# Altium PCB GBA CleanLight.PcbDoc
Units mm, origin at the board's own origin, x right, y up, seen from the top; angles counter-clockwise.
Board outline 130.09 x 53.51 mm, 2 copper layers (Top Layer, Bottom Layer); 35 components, 24 nets, 78 pads, 35 vias.
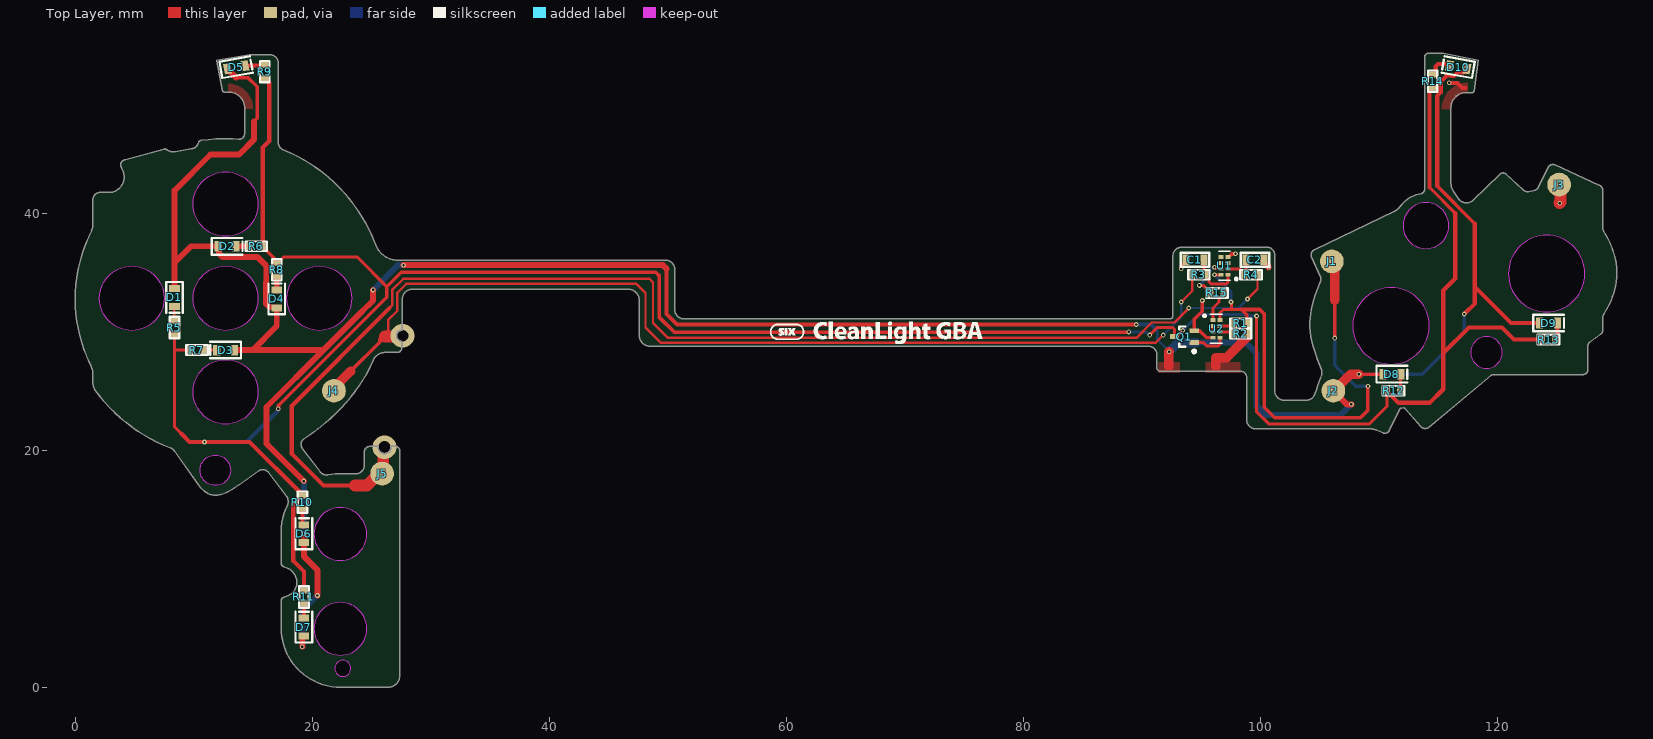
[diagram p0: Top Layer view]
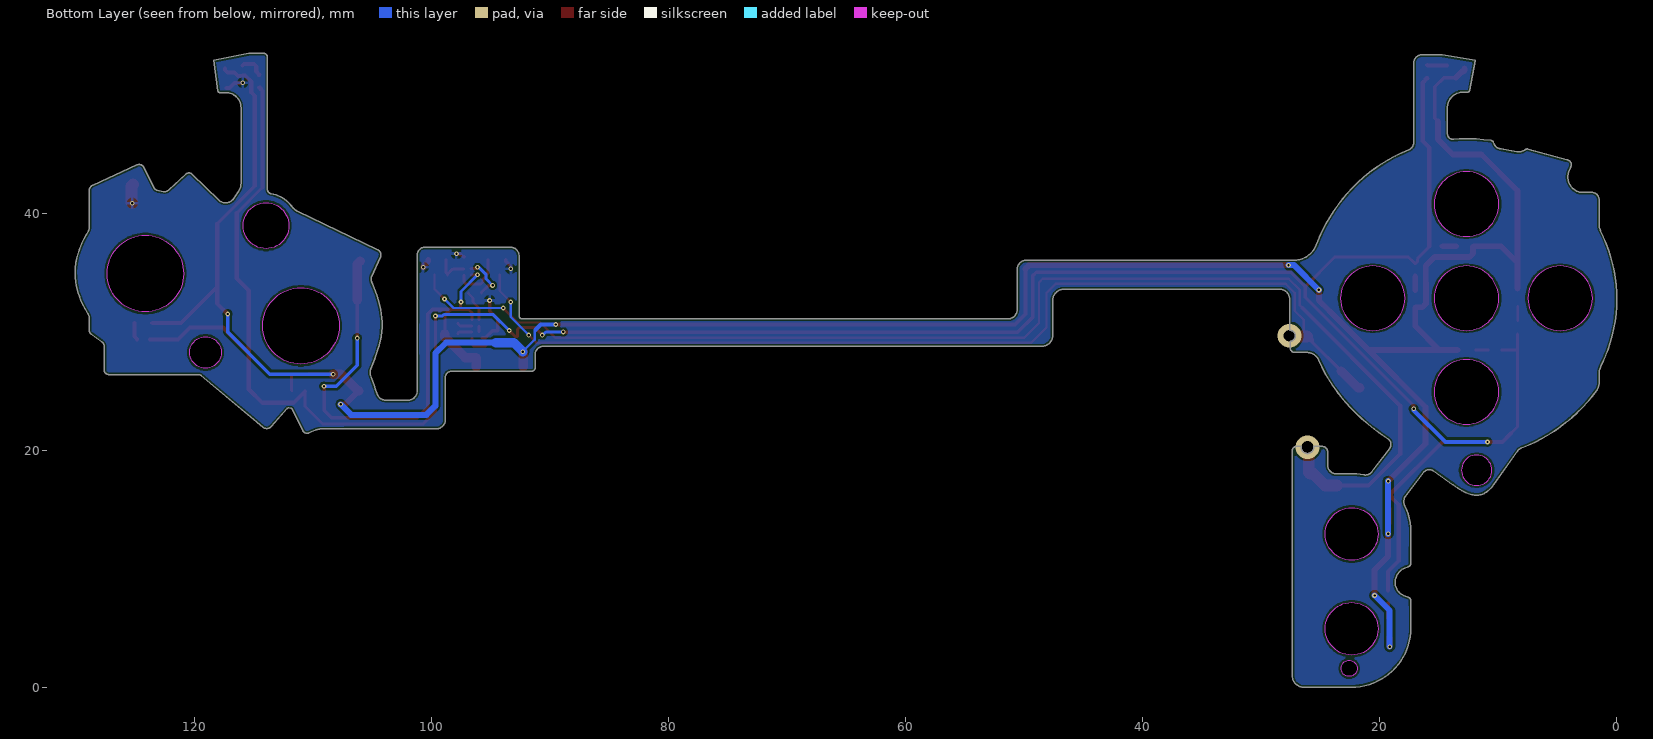
[diagram p1: Bottom Layer view, seen from below]

## Layer stack, top to bottom
Top Solder: solder mask 0.0102, Solder Resist, Dk 3.5
Top Layer: signal copper 0.0356
Dielectric 1: dielectric 0.32, FR-4, Dk 4.8
Bottom Layer: signal copper 0.0356
Bottom Solder: solder mask 0.0102, Solder Resist, Dk 3.5

## Board outline
359 vertices, not listed, extent 0.005,-0.001 130.095,53.507
cut-out: 4.785,30.098 cw(c4.785,32.825) 2.058,32.825 cw(c4.785,32.824) 4.785,35.552 cw(c4.785,32.825) 7.512,32.825 cw(c4.785,32.824)
cut-out: 12.7,30.098 cw(c12.7,32.825) 9.973,32.825 cw(c12.7,32.824) 12.7,35.552 cw(c12.7,32.824) 15.427,32.825 cw(c12.7,32.825)
cut-out: 12.7,38.041 cw(c12.7,40.768) 9.973,40.768 cw(c12.7,40.768) 12.7,43.496 cw(c12.7,40.768) 15.427,40.768 cw(c12.7,40.768)
cut-out: 12.7,22.199 cw(c12.7,24.926) 9.973,24.926 cw(c12.7,24.926) 12.7,27.654 cw(c12.7,24.926) 15.427,24.926 cw(c12.7,24.926)
cut-out: 12.7,22.199 cw(c12.7,24.926) 9.973,24.926 cw(c12.7,24.926) 12.7,27.654 cw(c12.7,24.926) 15.427,24.926 cw(c12.7,24.926)
cut-out: 20.604,30.098 cw(c20.604,32.825) 17.877,32.825 cw(c20.605,32.824) 20.604,35.552 cw(c20.604,32.824) 23.332,32.825 cw(c20.605,32.825)
cut-out: 11.835,17.026 cw(c11.835,18.312) 10.549,18.312 cw(c11.835,18.312) 11.835,19.598 cw(c11.835,18.312) 13.121,18.312 cw(c11.835,18.312)
cut-out: 20.159,12.93 ccw(c22.382,12.93) 22.382,10.707 ccw(c22.382,12.93) 24.605,12.93 ccw(c22.382,12.93) 22.382,15.153 ccw(c22.382,12.93)
cut-out: 20.159,4.935 ccw(c22.382,4.935) 22.382,2.713 ccw(c22.382,4.935) 24.605,4.935 ccw(c22.382,4.936) 22.382,7.158 ccw(c22.382,4.935)
cut-out: 21.914,1.591 ccw(c22.592,1.591) 22.592,0.913 ccw(c22.593,1.591) 23.27,1.591 ccw(c22.593,1.591) 22.592,2.269 ccw(c22.592,1.591)
cut-out: 112.05,38.949 ccw(c113.986,38.949) 113.986,37.013 ccw(c113.986,38.949) 115.922,38.949 ccw(c113.986,38.949) 113.986,40.885 ccw(c113.986,38.949)
cut-out: 120.94,34.905 ccw(c124.169,34.904) 124.17,31.675 ccw(c124.17,34.905) 127.399,34.905 ccw(c124.17,34.904) 124.17,38.134 ccw(c124.17,34.905)
cut-out: 107.813,30.499 ccw(c111.043,30.499) 111.043,27.269 ccw(c111.043,30.499) 114.273,30.499 ccw(c111.043,30.499) 111.043,33.728 ccw(c111.043,30.498)
cut-out: 117.756,28.25 ccw(c119.096,28.25) 119.096,26.911 ccw(c119.096,28.25) 120.435,28.25 ccw(c119.096,28.25) 119.096,29.59 ccw(c119.096,28.25)

## Design rules (kind name [scope] priority, off if disabled: settings)
BoardOutlineClearance [All] p1: gap=0 ignorepadtopadclearanceinfootprint=FALSE except(0.2: Poly-OutlineEdge Poly-CavityEdge Poly-CutoutEdge Poly-SplitBarrior Poly-SplitContinuation Region-OutlineEdge Region-CavityEdge Region-CutoutEdge Region-SplitBarrior Region-SplitContinuation)
Clearance [All] p1: gap=0.2 ignorepadtopadclearanceinfootprint=TRUE except(0: Arc-Hole Track-Hole SMDPad-Hole THPad-Hole Via-Hole Fill-Hole Poly-Hole Region-Hole Text-Hole)
HoleToHoleClearance [All] p1: gap=0.2 allowstackedmicrovias=TRUE
MinimumSolderMaskSliver [All] p1: minsoldermaskwidth=0
PolygonConnect [All] p1: connectstyle=Relief reliefconductorwidth=0.254 reliefentries=4 polygonreliefangle="90 Angle" airgapwidth=0.254
RoutingVias [All] p1: holewidth=0.2 width=0.4 viastyle="Through Hole" minholewidth=0.2 minwidth=0.4 maxholewidth=6.3 maxwidth=6.3
SilkToSilkClearance [All] p1: silktosilkclearance=0
SilkToSolderMaskClearance [IsPad] p1: minsilkscreentomaskgap=0 clearancetoexposedcopper=TRUE
SolderMaskExpansion [IsVia] p1: expansion=0.102 istentingtop=TRUE
Width [All] p1: maxlimit=6 minlimit=0.2 preferedwidth=0.2 minimp=50.000000 maximp=50.000000 favimp=50.000000
26 further rules are at their usual default settings.

## Components (designator, comment, footprint, x,y, rotation, side; value= is the part's Value field where it differs from the comment)
C1 "10uF" C0603 94.495,36.076 r0 top
C2 "10uF" C0603 99.551,36.076 r180 top
D1 "GREEN" LED0603 8.382,32.893 r270 top
D2 "GREEN" LED0603 12.827,37.211 r0 top
D3 "GREEN" LED0603 12.7,28.448 r180 top
D4 "GREEN" LED0603 17.018,32.766 r90 top
D5 "GREEN" LED0603 13.589,52.324 r10 top
D6 "GREEN" LED0603 19.304,12.954 r90 top
D7 "GREEN" LED0603 19.304,5.08 r90 top
D8 "GREEN" LED0603 111.113,26.416 r0 top
D9 "GREEN" LED0603 124.333,30.734 r0 top
D10 "GREEN" LED0603 116.713,52.324 r170 top
J1 "SP" SP2 106.045,35.941 r0 top
J2 "SP" SP2 106.172,25.019 r0 top
J3 "SP" SP2 125.222,42.418 r0 top
J4 "SP" SP2 21.844,25.019 r0 top
J5 "SP" SP2 25.908,18.034 r0 top
Q1 "SI1012X-T1-GE3" SC-89-3 93.599,29.591 r180 top
R1 "47K" R0402 98.348,30.718 r0 top
R2 "47K" R0402 98.348,29.829 r0 top
R3 "180k" R0402 94.822,34.806 r0 top
R4 "180k" R0402 99.224,34.806 r180 top
R5 "475R" R0402 8.382,30.353 r90 top
R6 "475R" R0402 15.282,37.211 r180 top
R7 "475R" R0402 10.287,28.448 r0 top
R8 "475R" R0402 17.018,35.221 r270 top
R9 "475R" R0402 16.002,51.943 r90 top
R10 "475R" R0402 19.177,15.621 r270 top
R11 "475R" R0402 19.304,7.62 r270 top
R12 "475R" R0402 111.252,25.019 r0 top
R13 "475R" R0402 124.333,29.337 r0 top
R14 "475R" R0402 114.554,51.139 r90 top
R15 "4.7k" R0402 96.351,33.274 r0 top
U1 "74LVC2G02HD4-7" "X2-DFN2010-8 (XSON-8 SOT833-1)" 96.987,35.556 r180 top
U2 "74LVC1G74GT,115" "X2-DFN2010-8 (XSON-8 SOT833-1)" 96.302,30.238 r0 top

## Footprints (in the part's own frame and the unit in brackets; to place one, negate y for a bottom-side part, rotate by r counter-clockwise, add the part's x,y. Pads: shape width x height; smd on the part's side, far side on the other; paste and mask are expansions set on the pad)
C0603 [mm]
  rect 0.6x0.9 smd mask+0: 1(-0.75,0) 2(0.75,0)
  silkscreen extent -1.2,-0.6 1.2,0.6, body extent -0.77,-0.43 0.78,0.43, height 0.8
LED0603 [mm]
  rect 0.6x0.9 smd mask+0: A(-0.75,0) K(0.75,0)
  silkscreen extent -1.3,-0.7 1.3,0.7, body extent -0.77,-0.43 0.78,0.43, height 0.36
R0402 [mm]
  rect 0.5x0.6 smd mask+0: 1(-0.55,0) 2(0.55,0)
  silkscreen extent -0.9,-0.4 0.9,0.4, body extent -0.5,-0.25 0.5,0.25, height 0.35
SC-89-3 [mm] "SOT23, 3-Leads, Body 1.58x1.60mm, Pitch 0.50mm, IPC Medium Density"
  rect 0.8x0.4 smd: 1(-0.83,0.5) 2(-0.83,-0.5) 3(0.83,0)
  silkscreen extent -0.96,-0.85 0.43,1.37, body extent -0.9,-0.84 0.9,0.84, height 0.8
SP2 [mm] "2mm solder pad"
  round 2 smd mask+0: 1(0,0)
"X2-DFN2010-8 (XSON-8 SOT833-1)" [mm] "1 x 1.95 x 0.5mm 8 pin 0.5mm pitch"
  rect 0.43x0.31 smd: 1(-0.29,0.75)
  rect 0.42x0.31 smd: 2(-0.295,0.25) 3(-0.295,-0.25) 4(-0.295,-0.75) 5(0.295,-0.75) 6(0.295,-0.25) 7(0.295,0.25) 8(0.295,0.75)
  silkscreen extent -1.1,-1.22 0.5,1.22, body extent -0.5,-0.97 0.5,0.97, height 0.5

## Part data
C1 C2: library part CAP_10UF_0603, "MURATA - GRM188C81C106MA73D - SMD Multilayer Ceramic Capacitor, 10 µF, 16 V, 0603 [1608 Metric], ± 20%, X6S, GRM Series - SMD Multilayer Ceramic Capacitor, 10 µF, 16 V, 0603 [1608 Metric], ± 20%, X6S, GRM Series", Case Code (Imperial)=0603, Case Code (Metric)=1608, Dielectric=X6S, Manufacturer=Murata, Manufacturer Part Number=GRM188C81C106MA73D, Max Operating Temperature=105°C, Min Operating Temperature=-55°C, Package Quantity=4000, Resistor Type=Ceramic, Supplier Part Number 1=490-7198-1-ND, Tolerance=20%, Voltage=16V, Capacitance=10uF, Case/Package=0603, Category="Ceramic Capacitors", ComponentLink1Description=https://datasheet.ciiva.com/14906/partnumbering-e-01-14906455.pdf?src-supplier=Digi-Key, ComponentLink1URL=https://datasheet.ciiva.com/14906/partnumbering-e-01-14906455.pdf?src-supplier=Digi-Key, ComponentLink2Description=https://datasheet.ciiva.com/14906/partnumbering-e-01-14906457.pdf?src-supplier=Digi-Key, ComponentLink2URL=https://datasheet.ciiva.com/14906/partnumbering-e-01-14906457.pdf?src-supplier=Digi-Key, Depth=0.8mm, Height=0.8mm, Lead Free="Lead Free", Length=1.6mm, Material=Ceramic, Mount="Surface Mount", Packaging="Tape and Reel", Pricing 1="1=0.36000, 10=0.24600, 50=0.16420, 100=0.13960, 500=0.09854, 1000=0.08622 (USD)", REACH SVHC="No SVHC", RoHS=Yes, RoHS Compliant=Yes, Series=GRM, Stock 1=58218, Supplier 1=Digi-Key, Termination=SMD/SMT, Thickness=0.031inch, Voltage Rating=16V, Voltage Rating (DC)=16V, Weight=0.000222oz, Width=0.8mm
D1 D2 D3 D4 D5 D6 D7 D8 D9 D10: library part LED_0603_GREEN, "LED Green Clear 0603", Color=Green, Current - Test=20mA, Lens Color=Colorless, Manufacturer="Lite-On Inc.", Manufacturer Part Number=LTST-C191KGKT, Millicandela Rating=35mcd, Package / Case="0603 (1608 Metric)", Supplier Part Number 1=160-1446-1-ND, Voltage - Forward (Vf) (Typ)=2V, Category=Optoelectronics, ComponentLink1Description=http://optoelectronics.liteon.com/upload/download/DS22-2000-228/S_110_LTST-C191KGKT.pdf, ComponentLink1URL=http://optoelectronics.liteon.com/upload/download/DS22-2000-228/S_110_LTST-C191KGKT.pdf, Height (Max)=0.55mm, Lens Style/Size="Rectangle with Flat Top, 1.10mm x 0.80mm", Lens Transparency=Clear, Mounting Type="Surface Mount", Packaging="Cut Tape (CT)", Pricing 1="1=0.2, 10=0.157, 100=0.0857, 250=0.05712, 500=0.04856, 1000=0.03713, 2500=0.03356 (GBP)", RoHS="RoHS Compliant", Size / Dimension="1.60mm L x 0.80mm W", Stock 1=668117, Supplier 1=Digi-Key, Viewing Angle=130°, Wavelength - Dominant=571nm, Wavelength - Peak=574nm
J1 J2 J3 J4 J5: "Solder pad"
Q1: "MOSFET N-CH 20V 500MA SC89-3", Case/Package=SC, Continuous Drain Current (ID)=500mA, Drain to Source Breakdown Voltage=20V, Drain to Source Resistance=700mR, Gate to Source Voltage (Vgs)=6V, Manufacturer="Vishay Siliconix", Max Operating Temperature=150°C, Max Power Dissipation=250mW, Min Operating Temperature=-55°C, Package Quantity=3000, Supplier Part Number 1=SI1012X-T1-GE3CT-ND, Threshold Voltage=900mV, Category=MOSFETs, ComponentLink1Description=https://datasheet.ciiva.com/26140/71166-26140614.pdf?src-supplier=Avnet+Europe, ComponentLink1URL=https://datasheet.ciiva.com/26140/71166-26140614.pdf?src-supplier=Avnet+Europe, ComponentLink2Description=https://datasheet.ciiva.com/11161/71166-11161416.pdf?src-supplier=Avnet, ComponentLink2URL=https://datasheet.ciiva.com/11161/71166-11161416.pdf?src-supplier=Avnet, ComponentLink3Description=https://datasheet.ciiva.com/931/71166-931866.pdf?src-supplier=Digi-Key, ComponentLink3URL=https://datasheet.ciiva.com/931/71166-931866.pdf?src-supplier=Digi-Key, ComponentLink4Description=https://datasheet.ciiva.com/931/71166-931867.pdf?src-supplier=Digi-Key, ComponentLink4URL=https://datasheet.ciiva.com/931/71166-931867.pdf?src-supplier=Digi-Key, ComponentLink5Description=https://datasheet.ciiva.com/931/71166-931868.pdf?src-supplier=Digi-Key, ComponentLink5URL=https://datasheet.ciiva.com/931/71166-931868.pdf?src-supplier=Digi-Key, Contact Plating=Tin,Matte, Drain to Source Voltage (Vdss)=20V, Drain-source On Resistance-Max=700mR, Element Configuration=Single, Fall Time=5ns, Height=0.8mm, Lead Free="Lead Free", Length=1.7mm, Manufacturer Part Number=SI1012X-T1-GE3, Mount="Surface Mount", Number of Channels=1, Number of Elements=1, Number of Pins=3, On-State Resistance=700mR, Packaging="Tape and Reel", Polarity=N-CHANNEL, Power Dissipation=250mW, Pricing 1="1=0.54000, 10=0.41600, 25=0.39720, 100=0.24950, 500=0.23100, 1000=0.15708 (USD)", Radiation Hardening=No, Rds On Max=700mR, REACH SVHC=Unknown, Rise Time=5ns, RoHS=Yes, RoHS Compliant=Yes, Series=TrenchFET®, Stock 1=35583, Supplier 1=Digi-Key, Turn-Off Delay Time=25ns, Turn-On Delay Time=5ns, Weight=0.001058oz, Width=0.95mm
R1 R2: library part RES_47K_0402, "Resistor 47K 1% 0.063W 0402", Manufacturer=Yageo, Manufacturing Part Number=RC0402FR-0747KL, Operating Temperature="-55°C ~ 155°C", Package / Case="0402 (1005 Metric)", Power (Watts)="0.063W, 1/16W", Resistance (Ohms)=34k, Supplier Device Package=0402, Supplier Part Number 1=311-47.0KLRCT-ND, Temperature Coefficient=±100ppm/°C, Tolerance=±1%, Category=Resistors, ComponentLink1Description=http://www.yageo.com/documents/recent/PYu-RC_Group_51_RoHS_L_04.pdf, ComponentLink1URL=http://www.yageo.com/documents/recent/PYu-RC_Group_51_RoHS_L_04.pdf, Composition="Thick Film", Features="Moisture Resistant", Height="0.016\" (0.40mm)", Number of Terminations=2, Packaging="Tape & Reel (TR)", Pricing 1="10000=0.00085, 30000=0.00074, 50000=0.00068, 100000=0.00067 (GBP)", RoHS="RoHS Compliant", Size / Dimension="0.039\" L x 0.020\" W (1.00mm x 0.50mm)", Stock 1=0, Supplier 1=Digi-Key
R3 R4: library part RES_180K_0402, "Thick Film Resistors 180K OHM 1%", Case Code (Imperial)=0402, Case Code (Metric)=1005, Manufacturer=Yageo, Manufacturer Part Number=RC0402FR-07180KL, Max Operating Temperature=155°C, Max Power Dissipation=63mW, Min Operating Temperature=-55°C, Resistance=180kR, Resistance Tolerance=1%, Resistor Type="Thick Film", Supplier Part Number 1=311-180KLRCT-ND, Temperature Coefficient=100ppm/°C, Voltage Rating=50V, Case/Package=0402, Category="Chip SMD Resistors", ComponentLink1Description=https://datasheet.ciiva.com/7983/1018594-7983497.pdf?src-supplier=Element14, ComponentLink1URL=https://datasheet.ciiva.com/7983/1018594-7983497.pdf?src-supplier=Element14, ComponentLink2Description=https://datasheet.ciiva.com/7849/1018594-7849851.pdf?src-supplier=Element14, ComponentLink2URL=https://datasheet.ciiva.com/7849/1018594-7849851.pdf?src-supplier=Element14, ComponentLink3Description=https://datasheet.ciiva.com/7849/1018594-7849852.pdf?src-supplier=Element14, ComponentLink3URL=https://datasheet.ciiva.com/7849/1018594-7849852.pdf?src-supplier=Element14, ComponentLink4Description=https://datasheet.ciiva.com/17025/pyu-rc0402-51-rohs-l-6-r-17025693.pdf?src-supplier=Future+Electronics, ComponentLink4URL=https://datasheet.ciiva.com/17025/pyu-rc0402-51-rohs-l-6-r-17025693.pdf?src-supplier=Future+Electronics, ComponentLink5Description=https://datasheet.ciiva.com/12656/pyu-rc0402-51-rohs-l-6-r-12656911.pdf?src-supplier=Mouser, ComponentLink5URL=https://datasheet.ciiva.com/12656/pyu-rc0402-51-rohs-l-6-r-12656911.pdf?src-supplier=Mouser, Construction=Rectangular, Depth=0.5mm, Features="Moisture Resistant", Lead Free="Lead Free", Length=1mm, Military Standard=Not, Number of Terminations=2, Packaging="Tape and Reel", Power Rating=63mW, Pricing 1="1=0.10000, 10=0.01600, 100=0.00660, 1000=0.00299, 2500=0.00259, 5000=0.00214 (USD)", REACH SVHC=Unknown, RoHS=Yes, RoHS Compliant=Yes, Series=RC, Size Code=0402, Stock 1=137008, Supplier 1=Digi-Key, Termination=SMD/SMT, Tolerance=1%
R5 R6 R7 R8 R9 R10 R11 R12 R13 R14: library part RES_475R_0402, "Resistor 475R 0.063W 0402", Manufacturer=Yageo, Manufacturer Part Number=RC0402FR-07475RL, Operating Temperature="-55°C ~ 155°C", Package / Case="0402 (1005 Metric)", Power (Watts)="0.063W, 1/16W", Resistance (Ohms)=475, Supplier Device Package=0402, Supplier Part Number 1=311-475LRTR-ND, Temperature Coefficient=±100ppm/°C, Tolerance=±1%, Category=Resistors, ComponentLink1Description=http://www.yageo.com/documents/recent/PYu-RC_Group_51_RoHS_L_04.pdf, ComponentLink1URL=http://www.yageo.com/documents/recent/PYu-RC_Group_51_RoHS_L_04.pdf, Composition="Thick Film", Features="Moisture Resistant", Height="0.016\" (0.40mm)", Number of Terminations=2, Packaging="Tape & Reel (TR)", Pricing 1="10000=0.00095, 30000=0.00083, 50000=0.00077, 100000=0.00075 (GBP)", RoHS="RoHS Compliant", Size / Dimension="0.039\" L x 0.020\" W (1.00mm x 0.50mm)", Stock 1=50000, Supplier 1=Digi-Key
R15: library part RES_4K7_0402, "Resistor 4.7k 0.063W 0402", Manufacturer=Yageo, Manufacturer Part Number=RT0402BRD074K7L, Operating Temperature="-55°C ~ 155°C", Package / Case="0402 (1005 Metric)", Power (Watts)="0.063W, 1/16W", Supplier Device Package=0402, Supplier Part Number 1=YAG1446CT-ND, Temperature Coefficient=±25ppm/°C, Tolerance=±0.1%, Category=Resistors, ComponentLink1Description=http://www.yageo.com/documents/recent/PYu-RT_1-to-0.05_RoHS_L_6.pdf, ComponentLink1URL=http://www.yageo.com/documents/recent/PYu-RT_1-to-0.05_RoHS_L_6.pdf, Composition="Thin Film", Features="Moisture Resistant", Height="0.014\" (0.35mm)", Number of Terminations=2, Packaging="Cut Tape (CT)", Pricing 1="1=0.26, 10=0.201, 25=0.1528, 100=0.0844, 250=0.07128, 500=0.0611, 1000=0.04655, 2500=0.04364, 5000=0.03928 (GBP)", Resistance (Ohms)=4.7k, RoHS="RoHS Compliant", Size / Dimension="0.039\" L x 0.020\" W (1.00mm x 0.50mm)", Stock 1=7559, Supplier 1=Digi-Key
U1: "74LVC Series 5.5 V 32 mA Surface Mount Dual 2-Input NOR Gate - XFDFN-8", High Level Output Current=32mA, Manufacturer=Diodes, Max Operating Temperature=125°C, Min Operating Temperature=-40°C, Quiescent Current=40uA, Supplier Part Number 1=74LVC2G02HD4-7DICT-ND, Category="Logic Gates", ComponentLink1Description=https://www.diodes.com/assets/Datasheets/74LVC2G02.pdf?src-supplier=Digi-Key, ComponentLink1URL=https://www.diodes.com/assets/Datasheets/74LVC2G02.pdf?src-supplier=Digi-Key, Logic Function="NOR GATE", Low Level Output Current=32mA, Manufacturer Part Number=74LVC2G02HD4-7, Mount="Surface Mount", Number of Circuits=2, Number of Inputs=2, Number of Pins=8, Packaging="Cut Tape", Pricing 1="1=0.50000, 10=0.37100, 25=0.32440, 100=0.20980, 250=0.17372, 500=0.13896, 1000=0.10654, 2500=0.09264 (USD)", Propagation Delay=5.5ns, RoHS=Yes, RoHS Compliant=Yes, Stock 1=3063, Supplier 1=Digi-Key
U2: "74LVC1G74 - Single D-type flip-flop with set and reset; positive-edge trigger", Manufacturer=Nexperia, Supplier Part Number 1=1727-3558-1-ND, Category="Latches and Flip Flops", ComponentLink1Description=https://assets.nexperia.com/documents/data-sheet/74LVC1G74.pdf?src-supplier=Digi-Key, ComponentLink1URL=https://assets.nexperia.com/documents/data-sheet/74LVC1G74.pdf?src-supplier=Digi-Key, Manufacturer Part Number=74LVC1G74GT,115, Pricing 1="1=0.51000, 10=0.38400, 25=0.34640, 100=0.23930, 250=0.20148, 500=0.16370, 1000=0.12593, 2500=0.11334 (USD)", RoHS=Yes, RoHS Compliant=Yes, Stock 1=21229, Supplier 1=Digi-Key

## Via types
v1: diameter 0.4, hole 0.2, Top Layer to Bottom Layer, tented both sides, 33 vias
v2: diameter 2, hole 1, Top Layer to Bottom Layer, 2 vias

## Nets (pads, with @x,y where several pads share a name; then routed paths per layer and width w, separated by ;. In a path a pad name is that pad's centre, name@x,y a point inside that pad or via, vN(x,y) a via of type N, cw(c..) or ccw(c..) an arc to the next point about the centre after c; other vN are vias at no path point)
GATE_TRIGGER: Q1.1 U2.5 | length 3
  Top Layer w0.254: Q1.1@94.353,29.091 95.202,29.091 95.514,28.779 96.448,28.779 96.597,28.928 U2.5
GBA_SELECT: J5.1 R4.1 | length 109.2
  Top Layer w0.2: 26.534,31.999 26.754,32.219 26.754,33.525 27.704,34.475 48.456,34.475 48.768,34.163 48.768,30.734 50.019,29.483 89.554,29.483 90.854,30.783 92.759,30.783 v1(93.98,32.004) ; v1(98.933,32.766) 99.774,33.607 R4.1
  Top Layer w0.35: 23.622,17.018 20.955,17.018 18.288,19.685 18.288,23.753 26.534,31.999
  Top Layer w1: 23.622,17.018 24.621,17.018 25.637,18.034 J5.1 26.007,18.133 26.007,20.165 v2(26.105,20.264)
  Bottom Layer w0.2: v1(93.98,32.004) 98.171,32.004 v1(98.933,32.766)
GBA_SELECT_SLOW: C2.2 R4.2 U1.2 | length 2.9
  Top Layer w0.254: U1.2 98.224,35.306 R4.2@98.674,34.856 ; R4.2 R4.2@98.674,34.856 ; C2.2 98.801,34.983 R4.2@98.674,34.856
GBA_START: J4.1 R3.1 | length 87
  Top Layer w0.2: 25.654,29.083 25.654,29.337 26.416,30.099 26.416,30.988 27.178,31.75 27.178,33.274 27.94,34.036 30.099,34.036 47.371,34.036 48.133,33.274 48.133,30.353 49.403,29.083 91.186,29.083 v1(91.821,29.718) ; v1(93.345,32.512) 94.272,33.439 R3.1
  Top Layer w0.3: 23.241,26.67 25.654,29.083 26.162,29.591
  Top Layer w0.8: J4.1@21.717,25.273 21.844,25.273 23.241,26.67 ; v2(27.619,29.663) v2@27.849,29.892
  Top Layer w1: 26.162,29.591 v2@26.678,29.591
  Bottom Layer w0.2: v1(91.821,29.718) 93.345,31.242 v1(93.345,32.512)
GBA_START_SLOW: C1.2 R3.2 U1.1 | length 4.4
  Top Layer w0.254: C1.2 95.245,34.983 95.372,34.856 95.372,34.756 95.686,34.442 95.686,34.211 95.865,34.031 97.128,34.031 97.277,34.18 U1.1
GND: C1.1 C2.1 J3.1 Q1.2 U1.4 U2.4 | length 10.1
  Top Layer w0.3: v1(93.345,35.306) 93.345,35.526 93.745,35.926 C1.1 ; v1(95.123,32.639) 95.123,31.737 94.429,31.043 Q1.2 94.877,30.091 95.485,29.483 95.758,29.483 ; U1.4@97.282,36.322 97.353,36.322 97.588,36.557 97.898,36.557 v1(97.917,36.576)
  Top Layer w0.35: v1(115.954,51.006) 115.964,50.996 116.657,50.996 117.075,50.578 117.329,50.578
  Top Layer w0.5: C2.1 100.301,35.926 100.711,35.516 v1(100.711,35.433)
  Top Layer w1: J3.1 125.349,42.291 125.349,40.93 v1(125.27,40.851)
NetD1_K: D1.K R5.2 | length 1.2
  Top Layer w0.2: R5.2 D1.K
NetD2_K: D2.K R6.2 | length 1.2
  Top Layer w0.5: D2.K R6.2
NetD3_K: D3.K R7.2 | length 1.1
  Top Layer w0.254: R7.2 D3.K
NetD4_K: D4.K R8.2 | length 1.2
  Top Layer w0.5: D4.K R8.2
NetD5_K: D5.K R9.2 | length 1.7
  Top Layer w0.35: D5.K 14.334,52.461 15.97,52.461 R9.2
NetD6_K: D6.K R10.2 | length 1.4
  Top Layer w0.35: R10.2 19.177,13.829 19.302,13.704 D6.K
NetD7_K: D7.K R11.2 | length 1.2
  Top Layer w0.35: D7.K R11.2
NetD8_K: D8.K R12.2 | length 1.4
  Top Layer w0.254: R12.2 111.832,25.049 111.832,26.385 D8.K
NetD9_K: D9.K R13.2 | length 1.5
  Top Layer w0.35: R13.2 124.883,29.387 125.083,29.587 D9.K
NetD10_K: D10.K R14.2 | length 2.1
  Top Layer w0.35: R14.2 114.604,51.689 114.679,51.764 114.679,51.814 114.808,51.943 114.808,52.373 115.013,52.578 115.851,52.578 D10.K
NetQ1_3: Q1.3 R5.1 R6.1 R7.1 R8.1 R9.1 R10.1 R11.1 R12.1 R13.1 R14.1 | length 223.3
  Top Layer w0.25: 114.3,42.164 116.459,40.005
  Top Layer w0.254: R5.1 8.382,28.321 ; 8.958,21.404 8.382,21.979 8.382,28.321 ; R7.1 8.509,28.448 8.382,28.321 ; R6.1 15.832,37.161 16.845,36.148 16.845,35.894 16.968,35.771 R8.1 17.068,35.771 17.619,36.322 23.779,36.322 26.304,33.797 ; v1(90.671,29.718) 90.678,29.718 91.313,30.353 92.62,30.353 92.769,30.204 Q1.3 92.969,29.591 93.472,30.094 v1(93.472,30.099) ; v1(99.695,31.327) 99.695,23.241 100.711,22.225 109.22,22.225 110.702,23.707 110.702,24.969 R12.1
  Top Layer w0.3: 17.155,23.767 26.304,32.916 26.304,33.797 27.526,35.019 49.006,35.019 49.276,34.749 49.276,31.242 50.546,29.972 88.889,29.972 v1(88.9,29.983)
  Top Layer w0.35: 8.958,21.404 9.66,20.701 v1(10.922,20.701) 14.722,20.701 19.052,16.371 19.052,16.246 R10.1@19.17,16.246 ; R6.1 15.832,45.536 16.383,46.087 16.383,51.012 16.127,51.268 16.127,51.318 16.052,51.393 R9.1 ; v1(17.145,23.495) 17.155,23.505 17.155,23.767 ; R10.1@19.127,16.171 19.004,16.048 19.004,15.998 18.415,15.409 18.415,10.668 19.304,9.779 R11.1 ; R12.1@110.702,24.969 111.668,24.003 114.3,24.003 115.443,25.146 115.443,28.194 ; 114.3,42.164 114.3,50.309 114.429,50.438 114.429,50.514 114.504,50.589 R14.1 ; 116.459,40.005 116.459,34.481 115.443,33.465 115.443,28.194 ; R13.1 121.412,29.337 120.396,30.353 117.602,30.353 115.443,28.194
  Bottom Layer w0.254: v1(88.9,29.983) 88.911,29.972 90.384,29.972 90.638,29.718 v1(90.671,29.718) ; v1(93.472,30.099) 94.811,31.438 98.987,31.438 99.098,31.327 v1(99.695,31.327)
  Bottom Layer w0.35: v1(10.922,20.701) 14.478,20.701 17.145,23.368 v1(17.145,23.495)
NetR1_1: R1.1 U2.7 | length 1.3
  Top Layer w0.254: U2.7 97.618,30.488 97.798,30.668 R1.1
NetR2_1: R2.1 U2.6 | length 1.3
  Top Layer w0.254: U2.6 97.675,29.988 97.798,29.865 R2.1
NetR15_1: R15.1 U1.7 | length 3.9
  Top Layer w0.254: v1(94.869,33.909) 94.897,33.881 95.244,33.881 95.801,33.324 R15.1 ; v1(96.139,35.433) 96.247,35.325 96.357,35.325 96.358,35.324 96.674,35.324 U1.7
  Bottom Layer w0.254: v1(94.869,33.909) 95.409,34.449 95.409,34.813 96.001,35.405 96.111,35.405 v1(96.139,35.433)
NetR15_2: R15.2 U2.1 | length 2.7
  Top Layer w0.254: U2.1 96.012,32.004 96.52,32.512 96.52,32.843 96.901,33.224 R15.2
NetU2_2: U2.2 U2.3 | length 0.5
  Top Layer w0.254: U2.3 U2.2
VCC_3V3: J1.1 R1.2 R2.2 U1.8 U2.8 | length 47.1
  Top Layer w0.254: v1(96.139,34.798) 96.147,34.806 U1.8 ; U2.8 96.597,31.573 96.901,31.877 97.536,31.877 97.652,31.877 ; v1(97.536,32.512) 97.564,32.484 97.564,31.965 97.652,31.877 ; R2.2 R1.2 98.898,31.382 98.403,31.877 97.652,31.877
  Top Layer w0.3: 98.403,31.877 99.949,31.877 100.33,31.496 100.33,23.622 101.219,22.733 108.458,22.733 109.093,23.368 v1(109.093,25.4) ; v1(106.299,29.464) 106.299,32.639
  Top Layer w0.8: 96.266,27.051 96.266,27.813 97.181,27.813 98.898,29.53 R2.2 ; J1.1 106.275,35.711 106.275,34.897 106.299,34.872 106.299,32.639
  Bottom Layer w0.254: v1(96.139,34.798) 97.536,33.401 v1(97.536,32.512)
  Bottom Layer w0.3: v1(106.299,29.464) 106.299,27.178 108.077,25.4 v1(109.093,25.4)
VCC_5V0: D1.A D2.A D3.A D4.A D5.A D6.A D7.A D8.A D9.A D10.A J2.1 | length 232.9
  Top Layer w0.254: D7.A@19.177,4.203 D7.A ; 24.234,31.73 24.257,31.753
  Top Layer w0.3: 13.599,51.445 14.595,51.445 15.367,50.673 15.367,48.006 15.113,47.752 ; v1(108.331,26.416) D8.A ; 114.935,42.298 118.11,39.123
  Top Layer w0.35: 49.911,35.306 49.911,31.496 50.8,30.607 v1(89.535,30.607) ; 114.935,42.298 114.935,49.89 115.229,50.184 115.229,51.094 115.759,51.624 115.934,51.624 116.159,51.584 116.347,51.584 116.638,51.875 117.253,51.875 117.452,52.074 D10.A ; v1(117.221,31.496) 118.11,32.385 118.11,33.782 ; 118.11,39.123 118.11,33.782 ; D9.A 121.158,30.734 118.11,33.782
  Top Layer w0.5: D1.A 8.382,35.814 ; D5.A 12.85,52.072 12.974,51.949 13.096,51.949 13.599,51.445 ; D3.A 14.986,28.448 ; 15.113,47.752 15.113,46.228 13.843,44.958 11.43,44.958 8.382,41.91 8.382,35.814 ; v1(19.177,3.429) D7.A@19.177,4.203 ; v1(19.304,12.95) D6.A 19.304,11.049 20.447,9.906 v1(20.447,7.747) ; v1(19.304,17.399) 16.154,20.549 16.154,23.65 20.952,28.448 ; 24.234,31.73 20.952,28.448 ; 24.257,31.753 25.146,32.642 v1(25.146,33.528) ; v1(27.708,35.619) 49.598,35.619 49.911,35.306 ; J2.1 107.315,23.876 v1(107.696,23.876) ; 8.382,35.814 9.779,37.211 D2.A 12.127,37.161 12.127,36.615 12.431,36.311 14.063,36.311 14.074,36.322 15.367,36.322 16.129,35.56 16.129,34.169 16.118,34.158 16.118,32.359 16.411,32.066 16.968,32.066 D4.A 17.018,30.48 14.986,28.448 ; 14.986,28.448 20.952,28.448
  Top Layer w0.8: 92.3,27.051 92.3,28.292 v1(92.329,28.321) ; J2.1 106.232,25.019 107.629,26.416 ; 107.66,26.416 v1(108.331,26.416)
  Bottom Layer w0.2: 91.246,30.166 91.321,30.091 91.321,29.329 v1(92.329,28.321)
  Bottom Layer w0.3: v1(108.331,26.416) 113.665,26.416 117.221,29.972 v1(117.221,31.496)
  Bottom Layer w0.35: v1(89.535,30.607) 90.805,30.607 91.246,30.166
  Bottom Layer w0.5: v1(19.177,3.429) 19.177,6.477 v1(20.447,7.747) ; v1(19.304,12.95) v1(19.304,17.399) ; v1(25.146,33.528) 27.237,35.619 v1(27.708,35.619) ; 94.615,29.083 98.806,29.083 99.695,28.194 99.695,23.749 100.457,22.987 106.807,22.987 v1(107.696,23.876)
  Bottom Layer w0.8: v1(92.329,28.321) 93.091,29.083 94.615,29.083
pads on no net: U1.3 U1.5 U1.6

## Polygon pours and split planes (outlines as drawn)
VCC_5V0 on Top Layer "VCC_5V0_L01_P011" (solid, pour order 11): 91.44,27.432 93.218,27.432 93.218,26.543 91.44,26.543
VCC_3V3 on Top Layer "VCC_3V3_L01_P010" (solid, pour order 10): 95.417,27.432 98.298,27.432 98.298,26.543 95.417,26.543
GND on Top Layer "GND_EDGE1" (solid, pour order 4): 117.505,50.178 ccw(c117.502,48.778) 116.102,48.778 115.316,48.778 cw(c117.523,48.801) 117.505,51.009 117.505,50.577
no net on Top Layer "GND_EDGE2" (solid, pour order 1): 14.318,48.806 ccw(c12.918,48.81) 12.918,50.21 12.918,50.918 cw(c12.891,48.801) 15.008,48.768 14.717,48.806
VCC_5V0 on Top Solder "VCC_5V0_L01_P008" (solid, pour order 8): 91.44,27.432 93.218,27.432 93.218,26.543 91.44,26.543
VCC_3V3 on Top Solder "VCC_3V3_L01_P009" (solid, pour order 9): 95.417,27.432 98.298,27.432 98.298,26.543 95.417,26.543
no net on Top Solder "NONET_L01_P000" (solid, pour order 0): 14.318,48.806 ccw(c12.918,48.81) 12.918,50.21 12.918,50.918 cw(c12.891,48.801) 15.008,48.768 14.717,48.806
GND on Top Solder "NONET_L01_P000" (solid): 117.505,50.178 ccw(c117.502,48.778) 116.102,48.778 115.316,48.778 cw(c117.523,48.801) 117.505,51.009 117.505,50.577
GND on Bottom Layer "GND_L02_P007" (solid, pour order 7): 359 vertices, not listed, extent 0.005,-0.001 130.095,53.507

## Silkscreen, mask and mechanical layers (free items; w line width, h text height)
Top Overlay:
  drawing of 18 lines, arcs and shapes, not listed
Board:
  drawing of 408 lines, arcs and shapes, not listed